# EAGLE board trippling_v1_2_moje (EAGLE 9.6.2)
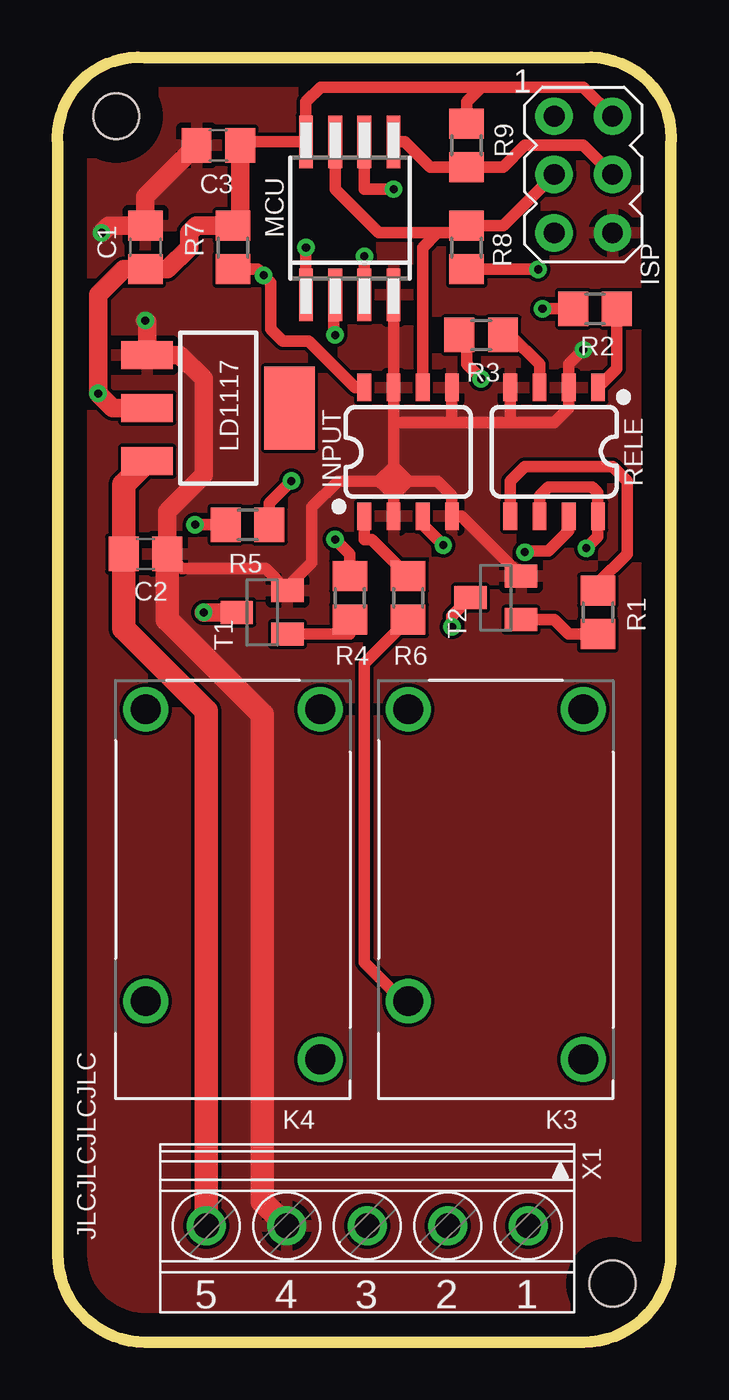
[diagram p0: board, top side]
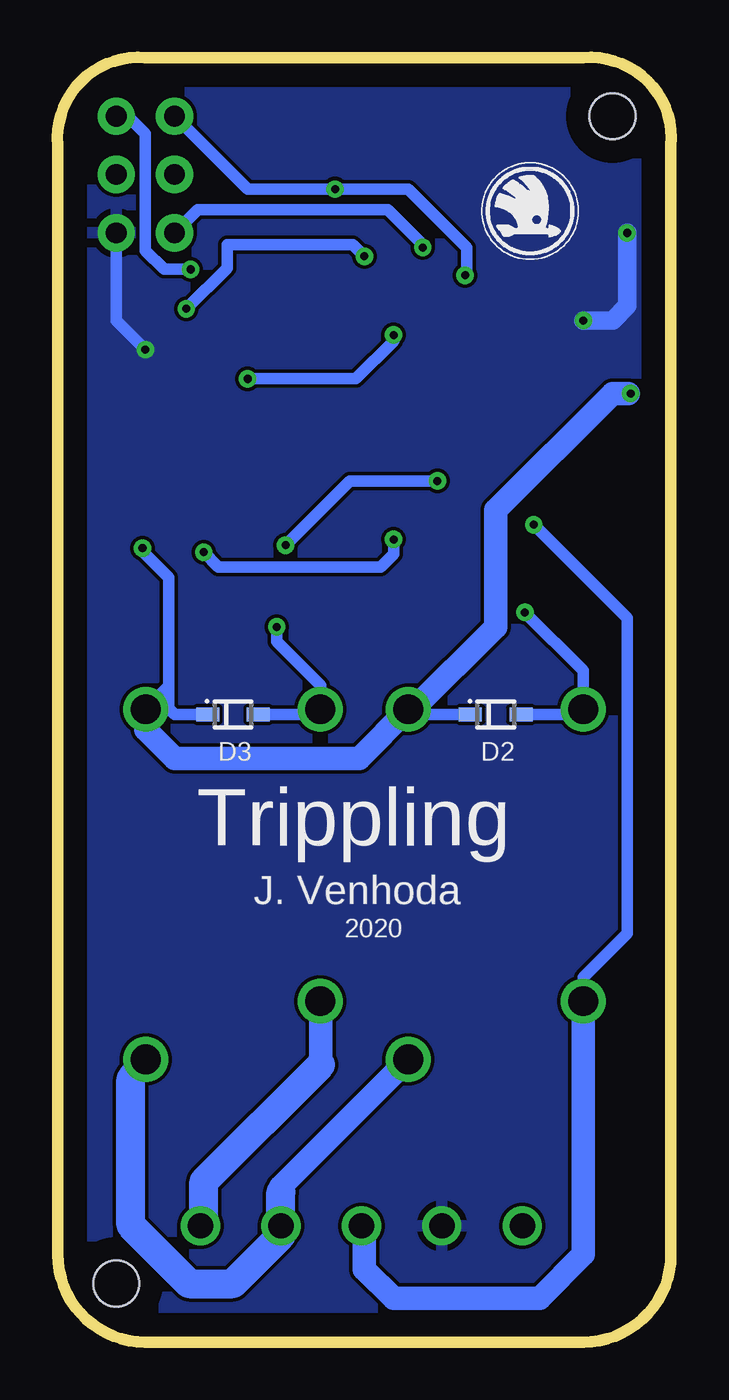
[diagram p1: board, bottom side, seen from below]

Size 26.7 x 55.89 mm. Coordinates in mm from the lower left corner, seen from the top.
Outline: 3.82,0 22.87,0 arc90 26.68,3.81 26.68,52.07 arc100 22.87,55.88 3.82,55.88 arc100 0.01,52.07 0.01,3.81 arc90 3.82,0
Copper layers (1*16): Top 0.035mm / dielectric 1.5mm / Bottom 0.035mm
Design rules "default": minimum track width 6mil, minimum drill 0.35mm, track to track 6mil, track to pad 6mil, pad to pad 6mil, via to via 6mil, smd to smd 6mil, copper to edge 40mil, drill to drill 6mil, minimum pad ring 10mil, minimum via ring 8mil, stop-mask expansion 4mil, vias tented up to drill 0mil, thermal gap 10mil
Holes 2 mm at 24.14,2.54 2.55,53.34

## Footprints (pad centres in the part's own frame; a part is rotated, then mirrored left to right if it is on the bottom)
C0805 = smd 1.3 x 1.5: 1 -0.95,0; 2 0.95,0
SOD323F = smd 1 x 0.6: A 1.1,0; C -1.1,0
SO08 = smd 0.6 x 1.2: 1 -1.905,-2.8; 2 -0.635,-2.8; 3 0.635,-2.8; 4 1.905,-2.8; 5 1.905,2.8; 6 0.635,2.8; 7 -0.635,2.8; 8 -1.905,2.8
AVRISP = drill 0.9 pad 1.626: 1 -1.27,2.54; 2 1.27,2.54; 3 -1.27,0; 4 1.27,0; 5 -1.27,-2.54; 6 1.27,-2.54
RELAY_2071508-1 = drill 1.3: 1 -7.85,3.8; 2 -7.85,-3.8; 3 7.39,3.8; 4 4.85,-3.8
SOT223 = smd 1.219 x 2.235: 1 -2.311,-3.099; 2 0,-3.099; 3 2.311,-3.099 | smd 3.6 x 2.2: 4 0,3.099
SOIC8_EIAJ_208MIL = smd 0.6 x 2.286: 1 -1.905,-3.33; 2 -0.635,-3.33; 3 0.635,-3.33; 4 1.905,-3.33; 5 1.905,3.33; 6 0.635,3.33; 7 -0.635,3.33; 8 -1.905,3.33
R0805 = smd 1.3 x 1.5: 1 -0.95,0; 2 0.95,0
SOT23-BEC = smd 1 x 1.4: B -0.95,-1.1; C 0,1.1; E 0.95,-1.1
1751277 = drill 1.1 pad 1.7: 1 -7,-0.1; 2 -3.5,-0.1; 3 0,-0.1; 4 3.5,-0.1; 5 7,-0.1

## Placement (x,y rotation side)
C1  100n  [C0805]  3.82,47.62 90 top
C2  100n  [C0805]  3.82,34.29 0 top
C3  100n  [C0805]  7,52.07 180 top
D2  1N4148WS  [SOD323F]  7.63,27.31 0 bottom
D3  1N4148WS  [SOD323F]  19.06,27.31 0 bottom
INPUT  ILD213T-IDL213T  [SO08]  15.25,38.73 0 top
ISP  AVRISP-6  [AVRISP]  22.87,50.8 0 top
K3  2071508-1  [RELAY_2071508-1]  19.06,19.69 270 top
K4  2071508-1  [RELAY_2071508-1]  7.63,19.69 270 top
LD1117  V_REG_LD1117VXXLD1117-SMD  [SOT223]  7,40.64 270 top
MCU  ATTINY85V-10S  [SOIC8_EIAJ_208MIL]  12.71,48.89 0 top
R1  120  [R0805]  23.51,31.75 270 top
R2  120  [R0805]  23.38,44.96 0 top
R3  120  [R0805]  18.43,43.81 0 top
R4  120  [R0805]  12.71,32.39 270 top
R5  470  [R0805]  8.27,35.56 180 top
R6  470  [R0805]  15.25,32.39 270 top
R7  10k  [R0805]  7.63,47.62 90 top
R8  10k  [R0805]  17.79,47.62 270 top
R9  10k  [R0805]  17.79,52.07 90 top
RELE  ILD213T-IDL213T  [SO08]  21.6,38.73 180 top
T1  MMBT3904  [SOT23-BEC]  8.9,31.75 90 top
T2  MMBT3904  [SOT23-BEC]  19.06,32.39 90 top
X1  1751277  [1751277]  13.48,4.95 180 top

## Library data of the parts
C1-C3 R1-R9 = resistor
D2 D3 = _hhn_diodes_smd
INPUT RELE = SparkFun-DiscreteSemi; PROD_ID: IC-09076
ISP = adafruit
K3 K4 = 2071508-1; AVAILABILITY: Warning; DESCRIPTION: Power Relay 5VDC 10A SPST-NO(18.2mm 10.2mm 15.2mm) THT; MF: TE Connectivity; MP: 2071508-1; PACKAGE: Package; PRICE: None; PURCHASE-URL: https://pricing.snapeda.com/search/part/2071508-1/?ref=eda
LD1117 = SparkFun-IC-Power; PROD_ID: VREG-13917
MCU = _hhn_attiny25_45_85
T1 T2 = transistor
X1 = con-phoenix-350; OC_FARNELL: unknown; OC_NEWARK: unknown; SPICEPREFIX: X

## Nets
+5V: C1.1 C3.1 D2.C D3.C ISP.2 K3.1 K4.1 LD1117.2 MCU.8 R7.2 R8.2 R9.2 RELE.6 RELE.8
COM: K3.3 K4.3 X1.2
GND: C1.2 C2.2 C3.2 INPUT.2 INPUT.4 INPUT.5 INPUT.7 ISP.6 LD1117.1 MCU.4 RELE.2 RELE.4 T1.E T2.E X1.4
I_LEFT: INPUT.6 ISP.3 MCU.7 R8.1
I_RIGHT: INPUT.8 ISP.1 MCU.6 R7.1
LEFT: K3.4 R6.2 X1.1
N$1: INPUT.1 R6.1
N$2: INPUT.3 R5.1
N$18: D3.A K3.2 T2.C
N$19: R1.2 T2.B
N$20: R4.2 T1.B
N$21: D2.A K4.2 T1.C
N$22: R1.1 RELE.5
N$23: R4.1 RELE.7
N$24: R3.2 RELE.3
N$25: R2.2 RELE.1
RELE_L: MCU.3 R2.1
RELE_R: MCU.2 R3.1
RESET: ISP.5 MCU.1
RIGHT: K4.4 R5.2 X1.3
SET: ISP.4 MCU.5 R9.1
VCC: C2.1 LD1117.3 X1.5

## Tracks (layer width: path | path; a pad name or v marks a point on that pad's centre or on a via)
+5V  (via drill 0.35)
  Top 0.508: RELE.6 20.97,36.83 21.35,37.21 23.26,37.21 23.51,36.96 RELE.8 23.51,35.05 v23,34.54 | ISP.2 22.87,54.61 18.43,54.61 | 18.43,54.61 17.79,53.97 R9.2 | 18.43,54.61 11.44,54.61 10.81,53.97 MCU.8 8.1,52.22 C3.1 | R8.2 20.78,46.67 20.84,46.61 v20.91,46.67
  Top 0.813: LD1117.2 2.4,40.64 v1.77,41.28 1.77,45.57 2.87,46.67 C1.1 4.78,46.67 5.73,47.62 5.73,48.26 6.04,48.58 R7.2 7.95,48.89 C3.1
  Bottom 0.508: D3.C 21.6,27.31 21.86,27.56 21.86,28.54 | v23,34.54 23,34.42 21.86,33.27 21.86,28.54 | v20.91,46.67 22.05,46.67 22.87,47.5 22.87,52.58 23.64,53.34 ISP.2 | v1.77,41.28 1.87,41.28 | K4.1 11.2,27.31 D2.C | K3.1 21.86,28.54
  Bottom 1.016: 1.87,41.28 2.55,41.28 7.63,36.2 7.63,31.11 11.21,27.53 K4.1 13.57,25.4 21.6,25.4 22.86,26.66 K3.1
COM
  Bottom 1.016: 23.51,11.43 23.51,11.65 K3.3 | 16.98,6.53 16.98,6.75 K4.3
  Bottom 1.27: 23.51,11.43 23.51,5.08 20.97,2.54 19.06,2.54 16.98,4.63 X1.2 16.98,6.53
GND  (via drill 0.35)
  Top 0.508: T2.E 17.56,35.94 INPUT.4 17.16,36.83 16.52,37.47 15.25,37.47 | C2.2 5.41,33.66 9.05,33.66 T1.E 10,32.85 11.06,33.91 11.06,36.32 12.21,37.47 13.98,37.47 | INPUT.2 14.62,36.83 | 14.62,36.83 15.25,37.47 | 13.98,37.47 14.3,37.15 | 14.3,37.15 14.62,36.83 | 14.62,40 INPUT.7 MCU.4 | 14.62,40 14.62,38.1 | 14.62,38.1 13.98,37.47 | 14.62,38.1 14.94,37.78 | 14.94,37.78 15.25,37.47 | 14.3,37.15 14.94,37.78 | 19.7,40 21.6,40 22.24,40.64 RELE.2 22.24,42.55 v22.87,43.18 | 19.7,40 RELE.4 | 19.7,40 17.16,40 | 17.16,40 INPUT.5 | 17.16,40 14.62,40
  Top 0.813: C2.2 4.77,36.13 6.36,37.72 6.36,41.91 5.32,42.95 LD1117.1 3.9,44.37 v3.82,44.45 | C3.2 3.82,49.84 C1.2 2.23,48.58 v1.92,48.26
  Top 1.016: X1.4 8.9,6.12 8.9,27.31 4.77,31.44 C2.2
  Bottom 0.508: ISP.6 24.14,44.45 v22.87,43.18
  Bottom 0.813: v1.92,48.26 1.92,45.08 2.55,44.45 v3.82,44.45
  pour Bottom: 0.01,0 0.01,55.88 26.68,55.88 26.68,0
  pour Top: -0.62,0 -0.62,55.88 26.14,55.88 26.14,0
I_LEFT
  Top 0.508: R8.1 17.48,48.26 16.52,48.26 15.89,47.62 INPUT.6 | MCU.7 12.08,50.17 13.98,48.26 17.79,48.26 R8.1 | ISP.3 19.38,48.58 R8.1
I_RIGHT  (via drill 0.35)
  Top 0.508: v14.62,50.17 13.35,50.17 MCU.6 | INPUT.8 12.96,41.53 10.94,43.56 9.79,43.56 9.29,44.07 9.29,46.1 v8.97,46.42 8.71,46.67 R7.1
  Bottom 0.508: ISP.1 18.43,50.17 v14.62,50.17 11.44,50.17 8.9,47.62 8.9,46.36 v8.97,46.42
LEFT
  Top 0.508: R6.2 13.35,29.53 13.35,16.51 15.02,14.83 K3.4
  Bottom 1.016: 15.25,12.06 15.25,14.83 K3.4
  Bottom 1.27: X1.1 20.33,5.2 20.33,6.98 15.25,12.06
N$1
  Top 0.508: R6.1 13.66,34.92 13.35,34.92 INPUT.1
N$2  (via drill 0.35)
  Top 0.508: INPUT.3 15.89,35.56 v16.78,34.67 | v10.17,37.47 9.22,36.51 R5.1
  Bottom 0.508: v16.78,34.67 13.98,37.47 v10.17,37.47
N$18  (via drill 0.35)
  Top 0.508: T2.C 17.16,31.58 v17.16,31.11
  Bottom 0.508: v17.16,31.11 17.16,30.48 15.25,28.58 15.25,27.55 K3.2 15.49,27.31 D3.A
N$19
  Top 0.508: T2.B 21.6,31.44 22.24,30.8 R1.2
N$20
  Top 0.508: R4.2 12.71,30.8 T1.B
N$21  (via drill 0.35)
  Top 0.813: T1.C v6.36,31.75
  Bottom 0.508: v6.36,31.75 3.82,29.21 3.82,27.55 K4.2 4.06,27.31 D2.A
N$22
  Top 0.508: R1.1 23.51,33.02 24.78,34.29 24.78,37.47 24.14,38.1 20.33,38.1 19.7,37.47 RELE.5
N$23  (via drill 0.35)
  Top 0.508: v12.08,34.92 12.71,34.29 R4.1 | RELE.7 22.24,35.31 21.35,34.42 20.39,34.42 v20.33,34.37
  Bottom 0.508: v20.33,34.37 19.7,33.73 12.64,33.73 12.08,34.29 v12.08,34.92
N$24
  Top 0.508: RELE.3 20.97,42.55 19.7,43.81 R3.2
N$25
  Top 0.508: RELE.1 24.33,42.36 R2.2
RELE_L  (via drill 0.35)
  Top 0.508: v21.1,44.96 R2.1 | v13.35,47.24 MCU.3
  Bottom 0.508: v13.35,47.24 13.86,47.75 19.32,47.75 19.32,46.74 v21.1,44.96
RELE_R  (via drill 0.35)
  Top 0.508: R3.1 17.79,43.5 17.79,42.55 v18.43,41.91 | MCU.2 12.02,45.5 12.02,43.88 v12.08,43.81
  Bottom 0.508: v18.43,41.91 13.73,41.91 12.08,43.56 v12.08,43.81
RESET  (via drill 0.35)
  Top 0.508: v10.81,47.62 MCU.1
  Bottom 0.508: ISP.5 20.59,49.28 12.33,49.28 10.81,47.75 v10.81,47.62
RIGHT  (via drill 0.35)
  Top 0.508: v5.98,35.56 R5.2
  Bottom 0.508: v5.98,35.56 1.92,31.5 1.92,17.78 3.82,15.88 3.82,14.83
  Bottom 1.016: X1.3 13.35,4.93 13.35,3.17 12.08,1.91 5.73,1.91 3.82,3.81 3.82,14.83 K4.4
SET
  Top 0.508: MCU.5 15.1,52.22 16.2,51.12 R9.1 19.38,51.12 20.33,52.07 22.87,52.07 ISP.4
VCC
  Top 1.016: X1.5 6.48,27.45 2.87,31.05 C2.1 2.87,37.3 LD1117.3

## Text on the board
tNames: JLCJLCJLCJLC
bNames: Trippling | J. Venhoda | 2020